# Altium PCB PCB1.PcbDoc
Units mil, origin at the board's own origin, x right, y up, seen from the top; angles counter-clockwise.
Board outline 1870.02 x 1215.03 mil, 2 copper layers (Top Layer, Bottom Layer); 8 components, 8 nets, 25 pads, 0 vias.
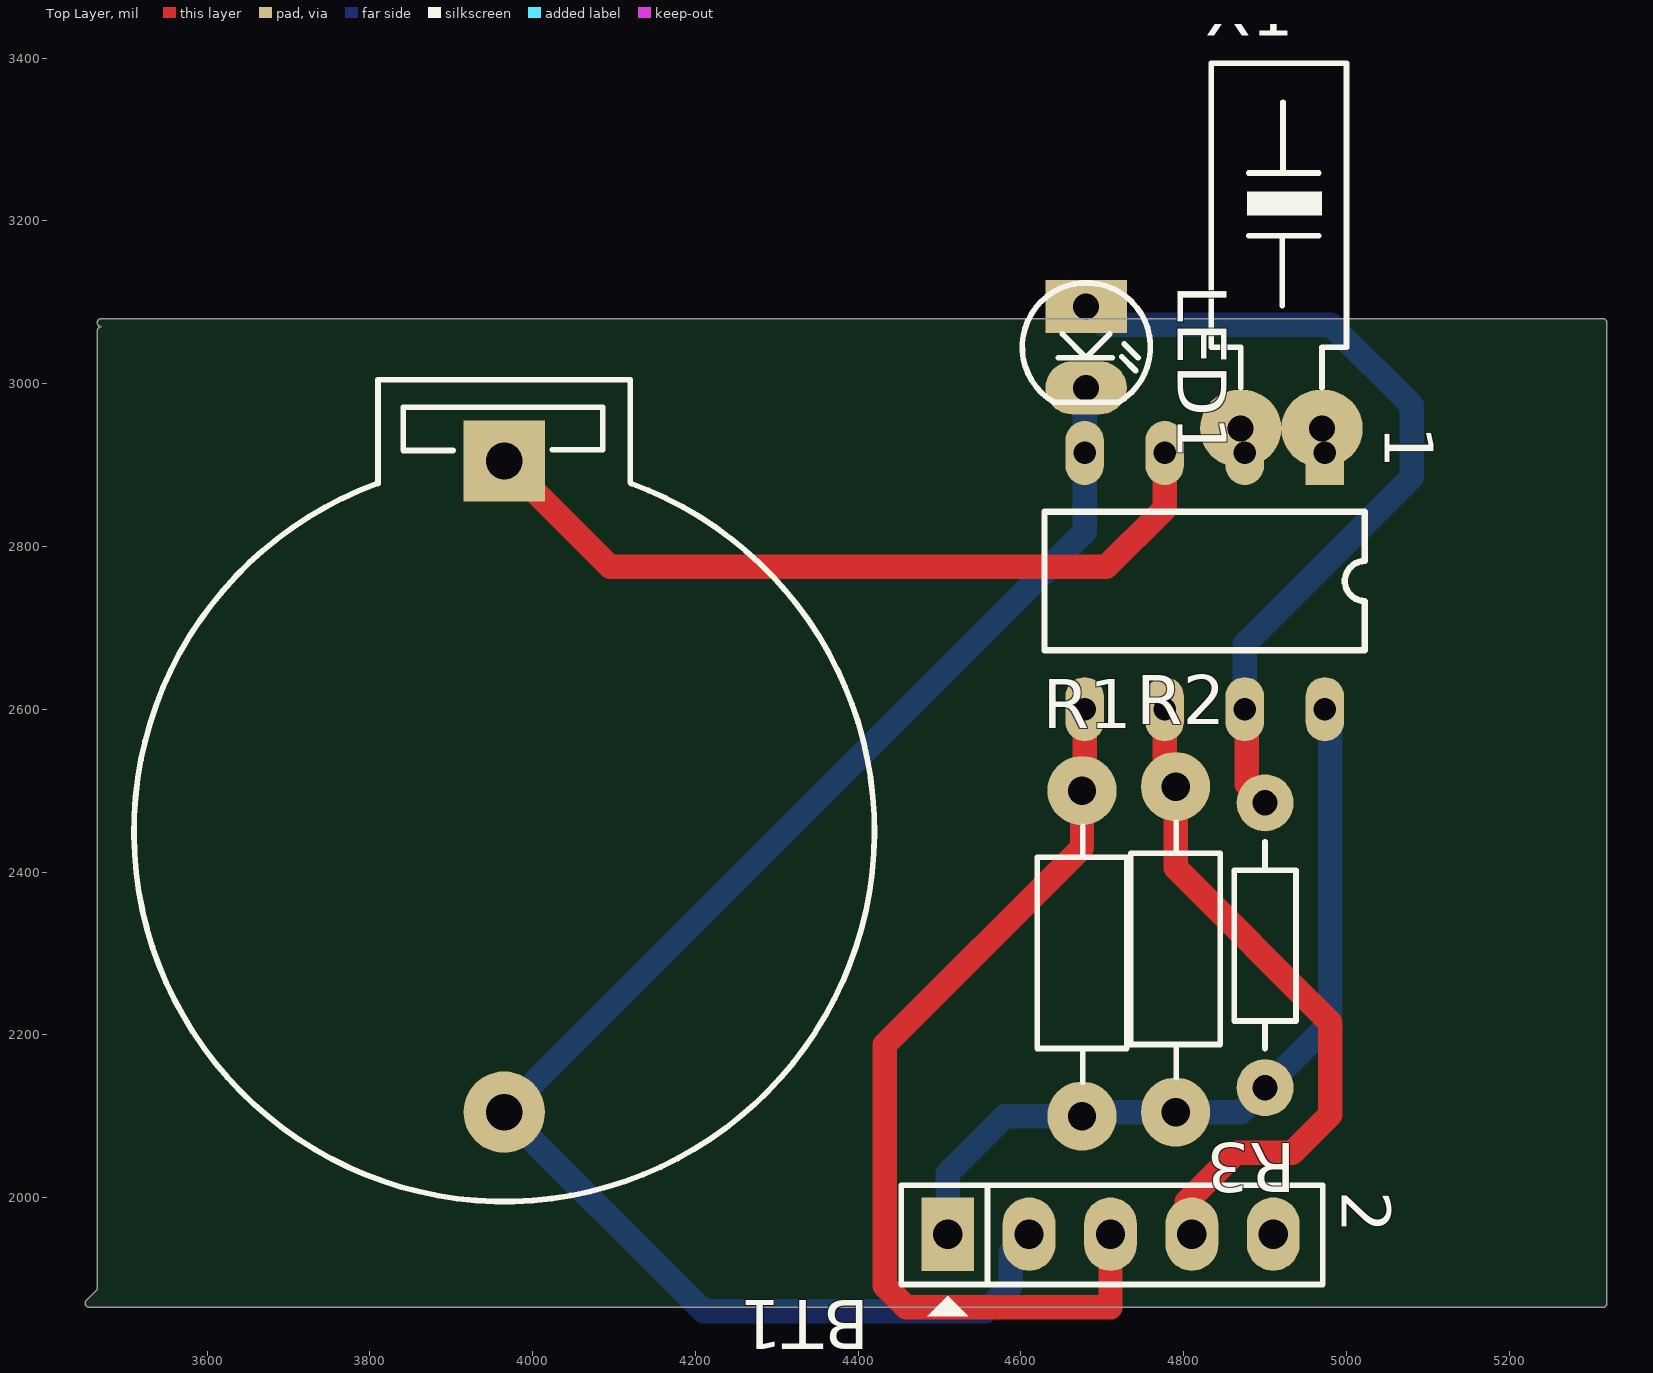
[diagram p0: Top Layer view]
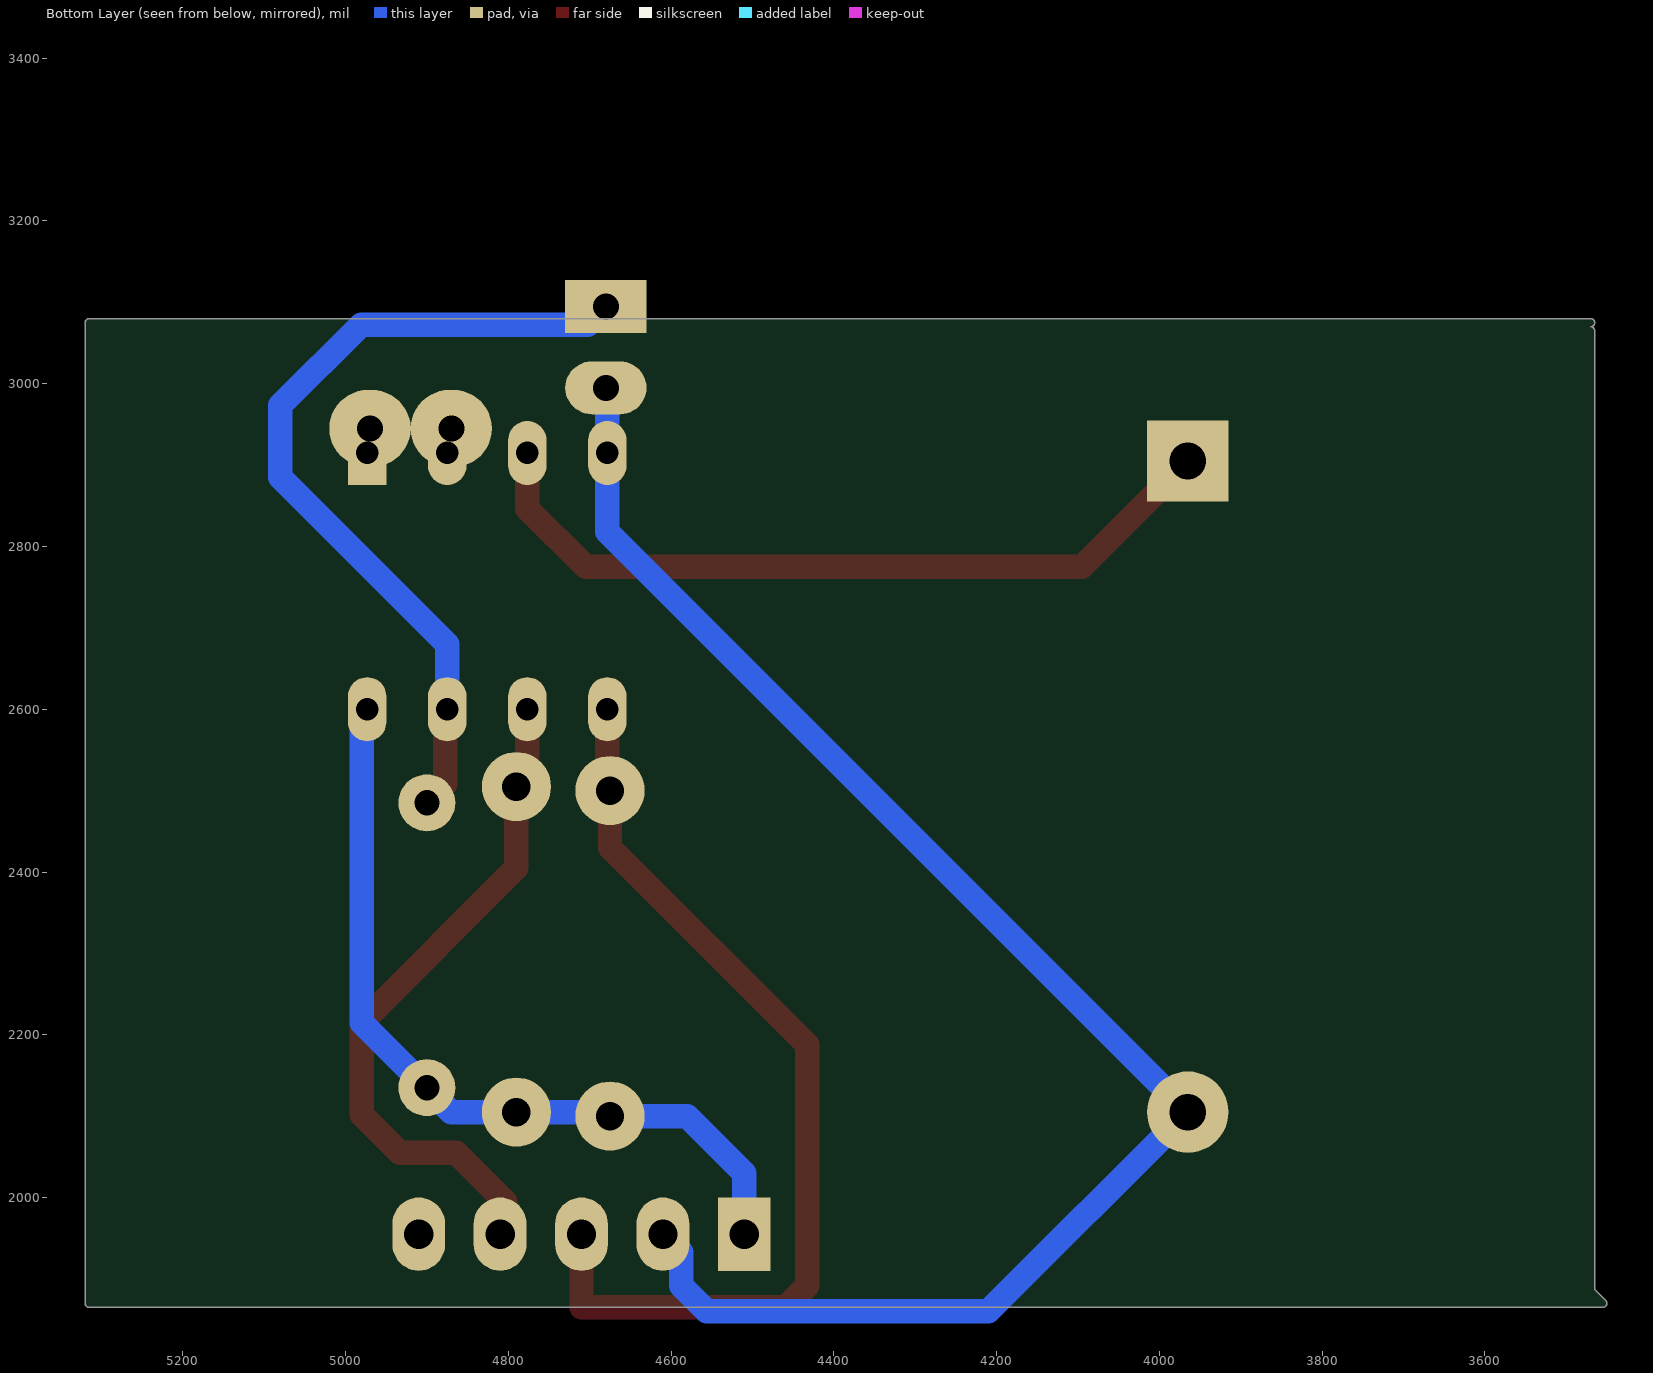
[diagram p1: Bottom Layer view, seen from below]

## Layer stack, top to bottom
Top Solder: solder mask 0.4, Solder Resist, Dk 3.5
Top Layer: signal copper 1.4
Dielectric 1: dielectric 12.6, FR-4, Dk 4.8
Bottom Layer: signal copper 1.4
Bottom Solder: solder mask 0.4, Solder Resist, Dk 3.5

## Board outline
3455,1864.98 cw(c3455,1870) 3451.47,1873.56 3451.45,1873.55 3464.99,1887.08 3464.99,3065 cw(c3470,3065) 3469.61,3070 cw(c3470,3075) 3470,3080.01 5315,3080.01 cw(c5315,3075) 5320.02,3075 5320.02,1870 cw(c5315,1870) 5315,1864.98

## Design rules (kind name [scope] priority, off if disabled: settings)
Clearance [All] p1: gap=30
PolygonConnect [All] p1: connectstyle=Relief reliefconductorwidth=10 reliefentries=4 polygonreliefangle="90 Angle" airgapwidth=10
RoomDefinition Sheet1 [InComponentClass('Sheet1')] p1: confinementstyle=ConfineIn formatcopy=TRUE lockcomponents=FALSE outline 5365,1830 5770,1830 5770,2370 5365,2370
RoutingVias [All] p1: holewidth=28 width=60 viastyle="Through Hole" minholewidth=28 minwidth=60 maxholewidth=28 maxwidth=60
SolderMaskExpansion [All] p1: expansion=4
Width [All] p1: maxlimit=60 minlimit=30 preferedwidth=40
30 further rules are at their usual default settings.

## Components (designator, comment, footprint, x,y, rotation, side; value= is the part's Value field where it differs from the comment)
1 "DS_1307" DIP8_DS1307 4973.43,2915 r270 top
2 "JP5" JP5 4510,1955 r0 top
BT1 "PIN 3V" PIN3V 3965,2905 r270 top
LED1 "LED" LED-3 4680,3095 r270 top
R1 "10k" R1/2W 4675,2100 r90 top
R2 "10k" R1/2W 4790,2105 r90 top
R3 "1k" R1/4W 4900,2485 r270 top
X1 "32,768 Khz" XT32k 4870,2945 r90 top

## Footprints (in the part's own frame and the unit in brackets; to place one, negate y for a bottom-side part, rotate by r counter-clockwise, add the part's x,y. Pads: shape width x height; smd on the part's side, far side on the other; paste and mask are expansions set on the pad)
DIP8_DS1307 [mm]
  rect 2x1.2 hole 0.7: 1(0,0)
  oval 2x1.2 hole 0.7: 2(0,-2.5) 3(0,-5) 4(0,-7.5) 5(8,-7.5) 6(8,-5) 7(8,-2.5) 8(8,0)
  silkscreen extent 1.84,-8.75 6.16,1.25, body extent 0.12,-8.5 8.01,0.88, height 3.83
JP5 [mil] "JP5"
  rect 65x90 hole 36: 1(0,0)
  oval 65x90 hole 36: 2(100,0) 3(200,0) 4(300,0) 5(400,0)
  silkscreen extent -57,-101 461,60, body extent -48,-53 448,45, height 323
LED-3 [mil] "LED 2 PIN, 3ly Only colour"
  rect 65x100 hole 32: 1(0,0)
  oval 65x100 hole 32: 2(100,0)
  silkscreen extent -29,-78 118,79, body extent -25,-75 113,75, height 217
PIN3V [mil] "Socket PIN 3V"
  rect 100x100 hole 45: 1(0,0)
  round 100 hole 45: 2(800,0)
  silkscreen extent -100,-455 910,455, body extent -128,-447 1002,449, height 278
R1/2W [mil] "R 1/2W, 2 pin, 300mil"
  round 85 hole 35: 1(0,0) 2(400,0)
  silkscreen extent 42,-55 356,55, body extent -12,-45 414,49, height 91
R1/4W [mil] "R 1/4W, 2 Pin, 350mil"
  round 70 hole 31: 1(0,0) 2(350,0)
  silkscreen extent 48,-38 302,38, body extent -40,-47 386,47, height 111
XT32k [mil] "Crystal 32k, 2 pin, real timer for DS1307"
  oval 95x100 hole 32: 1(0,0) 2(0,-100)
  silkscreen extent 50,-130 449,36

## Part data
BT1: "Battery 3VDC"
LED1: "LED Single colour Green and Red"
R1 R2 R3: library part R1/4W, "Resistor 1/4W"
X1: library part XT32k, "Crystal 32,768kHz for timer real"

## Nets (pads, with @x,y where several pads share a name; then routed paths per layer and width w, separated by ;. In a path a pad name is that pad's centre, name@x,y a point inside that pad or via, vN(x,y) a via of type N, cw(c..) or ccw(c..) an arc to the next point about the centre after c; other vN are vias at no path point)
GND: 1.4 2.2 BT1.2 LED1.2 | length 1996.1
  Bottom Layer w30: 2.2 4587.5,1932.5 4587.5,1891.36 4556.14,1860 4210,1860 BT1.2 4678.15,2818.15 1.4 4678.15,2993.15 LED1.2
Net1_1: 1.1 X1.2
Net1_2: 1.2 X1.1
Net1_3: 1.3 BT1.1 | length 963.5
  Top Layer w30: BT1.1 4095,2775 4705,2775 4776.57,2846.57 1.3
Net1_7: 1.7 LED1.1 R3.1 | length 1034
  Top Layer w30: 1.7 4877.5,2597.54 4877.5,2507.5 R3.1
  Bottom Layer w30: LED1.1 4702.5,3072.5 4980.81,3072.5 5080,2973.31 5080,2885 4875,2680 1.7
SCL: 1.6 2.4 R2.2 | length 849.2
  Top Layer w30: 1.6 4776.57,2518.43 R2.2 4790,2405 4980,2215 4980,2101.86 4933.14,2055 4863.74,2055 4803.74,1995 4810,1995 2.4
SDA: 1.5 2.3 R1.2 | length 1188.8
  Top Layer w30: 1.5 4678.15,2503.15 R1.2 4675,2430 4432.5,2187.5 4432.5,1891.36 4458.86,1865 4710,1865 2.3
VCC: 1.8 2.1 R1.1 R2.1 R3.2 | length 1009.4
  Bottom Layer w30: 2.1 4510,2030 4580,2100 R1.1 4680,2105 R2.1 4870,2105 R3.2 4980,2215 4980,2593.46 1.8
pads on no net: 2.5